# Altium PCB PCB.PcbDoc
Units mm, origin at the board's own origin, x right, y up, seen from the top; angles counter-clockwise.
Board outline 100 x 48.5 mm, 2 copper layers (TOP, BOT), stack 1.636 mm thick; 97 components, 84 nets, 366 pads, 228 vias.
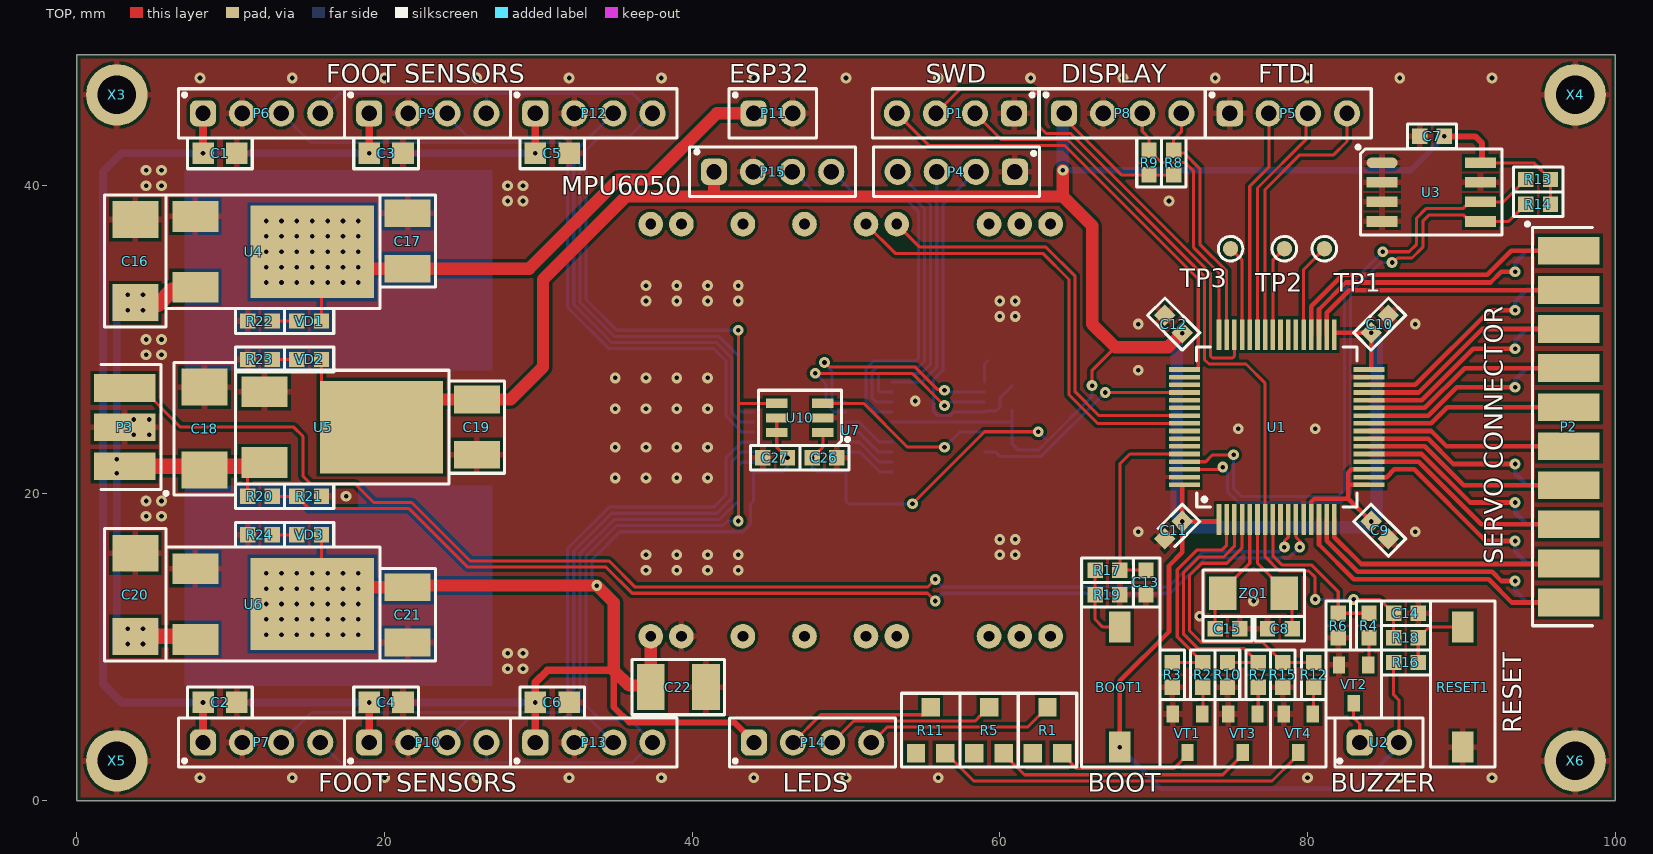
[diagram p0: TOP view]
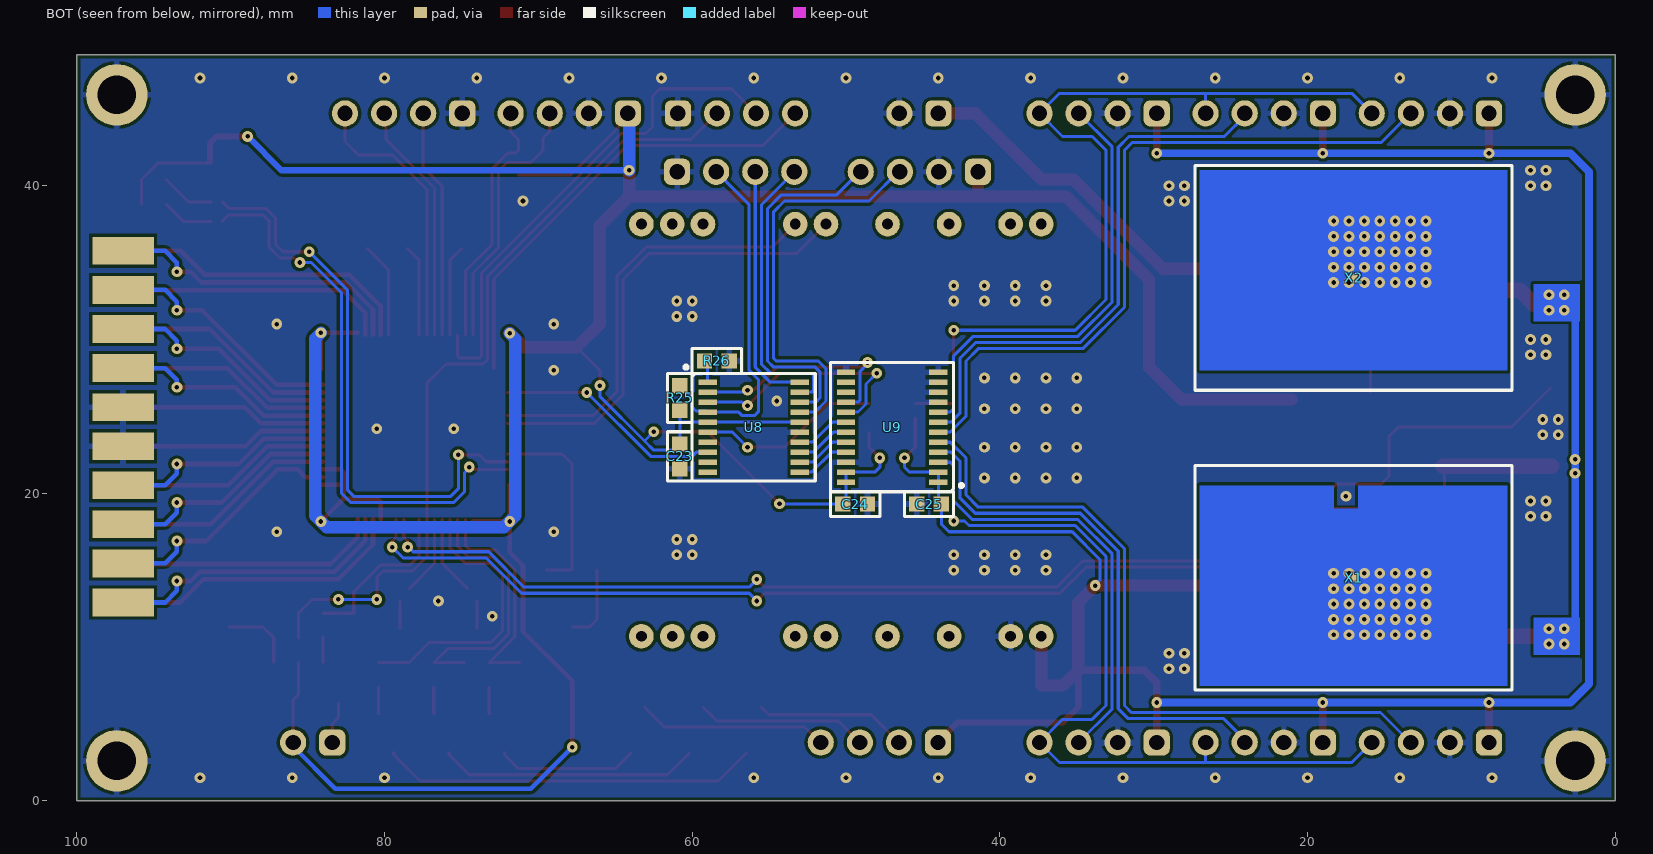
[diagram p1: BOT view, seen from below]

## Layer stack, top to bottom
Top Solder: solder mask 0.0102, Solder Resist, Dk 3.5
TOP: signal copper 0.018
Dielectric 1: core 1.6, FR-4, Dk 4.2
BOT: signal copper 0.018
Bottom Solder: solder mask 0.0102, Solder Resist, Dk 3.5

## Board outline
0,0 0,48.5 40,48.5 100,48.5 100,0 40,0

## Design rules (kind name [scope] priority, off if disabled: settings)
AcuteAngle [All] p1 off: minimum=3.50000000000000E+0001 checktracksonly=FALSE
AssemblyTestPointUsage [All] p1 off:
AssemblyTestpoint [All] p1 off: testpointundercomponent=TRUE minsize=1.016 maxsize=2.54 preferedsize=1.524 minholesize=0 maxholesize=1.016 preferedholesize=0.813 testpointgrid=0.025 usegrid=TRUE gridtolerance=0 allowsidetop=TRUE allowsidebottom=TRUE
BoardOutlineClearance "BoardOutlineClearance 1" [All] p1: gap=0.25 ignorepadtopadclearanceinfootprint=FALSE except(0: Arc-SplitContinuation Track-SplitContinuation SMDPad-SplitContinuation THPad-SplitContinuation Via-SplitContinuation Fill-SplitContinuation Poly-SplitContinuation Region-SplitContinuation Text-SplitContinuation) // Milling
BoardOutlineClearance "BoardOutlineClearance 2" [All] p2: gap=0.4 ignorepadtopadclearanceinfootprint=FALSE except(0: Arc-SplitContinuation Track-SplitContinuation SMDPad-SplitContinuation THPad-SplitContinuation Via-SplitContinuation Fill-SplitContinuation Poly-SplitContinuation Region-SplitContinuation Text-SplitContinuation) // V-Cut
Clearance "Clearance-1 1 Oz" [All] p1: gap=0.2 ignorepadtopadclearanceinfootprint=FALSE except(0.25: Arc-Hole Track-Hole SMDPad-Hole THPad-Hole Via-Hole Fill-Hole Poly-Hole Region-Hole Text-Hole) // Standart
Clearance "Clearance-1 1/2 Oz" [All] p2: gap=0.125 ignorepadtopadclearanceinfootprint=FALSE except(0.2: Arc-Fill Arc-Poly Track-Fill Track-Poly SMDPad-SMDPad SMDPad-Fill SMDPad-Poly THPad-Fill THPad-Poly Via-Fill Via-Poly Fill-Fill Fill-Poly Poly-Poly Poly-Region Poly-Text; 0.25: Arc-Hole Track-Hole SMDPad-Hole THPad-Hole Via-Hole Fill-Hole Poly-Hole Region-Hole Text-Hole) // Standart
Clearance "Clearance-2 1 Oz" [All] p3: gap=0.15 ignorepadtopadclearanceinfootprint=FALSE except(0.2: Arc-Fill Arc-Poly Track-Fill Track-Poly SMDPad-Fill SMDPad-Poly THPad-Fill THPad-Poly Via-Fill Via-Poly Fill-Fill Fill-Poly Poly-Poly; 0.25: Arc-Hole Track-Hole SMDPad-Hole THPad-Hole Via-Hole Fill-Hole Poly-Hole Region-Hole Text-Hole) // Advance
Clearance "Clearance-2 1/2 Oz" [All] p4: gap=0.1 ignorepadtopadclearanceinfootprint=FALSE except(0.15: Arc-Fill Arc-Poly Track-Fill Track-Poly SMDPad-SMDPad SMDPad-Fill SMDPad-Poly THPad-Fill THPad-Poly Via-Fill Via-Poly Fill-Fill Fill-Poly Poly-Poly Poly-Region Poly-Text; 0.25: Arc-Hole Track-Hole SMDPad-Hole THPad-Hole Via-Hole Fill-Hole Poly-Hole Region-Hole Text-Hole) // Advance
ComponentClearance [All] p1: gap=0 collisioncheckmode=3 verticalgap=0 showdistances=FALSE
DiffPairsRouting "DiffPairsRouting 1 Oz" [All] p1: maxlimit=0.254 minlimit=0.2 mostfreqgap=0.254 toplayer_minwidth=0.2 toplayer_maxwidth=0.381 toplayer_prefwidth=0.381 bottomlayer_minwidth=0.2 bottomlayer_maxwidth=0.381 bottomlayer_prefwidth=0.381 maxuncoupledlength=12.7
DiffPairsRouting "DiffPairsRouting 1/2 Oz" [All] p2: maxlimit=0.254 minlimit=0.1 mostfreqgap=0.254 toplayer_minwidth=0.1 toplayer_maxwidth=0.381 toplayer_prefwidth=0.381 bottomlayer_minwidth=0.1 bottomlayer_maxwidth=0.381 bottomlayer_prefwidth=0.381 maxuncoupledlength=12.7
FabricationTestPointUsage [All] p1 off: valid=0 allowmultiple=FALSE
FabricationTestpoint [All] p1 off: side=3 testpointundercomponent=TRUE minsize=1.016 maxsize=2.54 preferedsize=1.524 minholesize=0 maxholesize=1.016 preferedholesize=0.813 testpointgrid=0.025 allowsidetop=TRUE allowsidebottom=TRUE usegrid=TRUE gridtolerance=0
HoleSize "Minimum HoleSize" [IsPad] p1: absolutevalues=TRUE maxlimit=5.9 minlimit=0.6 maxpercent=80.000 minpercent=20.000
HoleSize "Minimum HoleSize VIA 1" [IsVia] p2: absolutevalues=TRUE maxlimit=5.9 minlimit=0.3 maxpercent=80.000 minpercent=20.000 // Standart
HoleSize "Minimum HoleSize VIA 2" [IsVia] p3: absolutevalues=TRUE maxlimit=5.9 minlimit=0.2 maxpercent=80.000 minpercent=20.000 // Advance
HoleToHoleClearance Hole2HoleClearance [All] p1: gap=0.25 allowstackedmicrovias=FALSE
MinimumAnnularRing "Minimum AR VIA Standart" [IsVia] p1: minimumring=0.15
MinimumAnnularRing "Minimum AR PAD Standart" [IsPAD] p2: minimumring=0.2
MinimumAnnularRing "Minimum AR VIA Advance" [IsVia] p3: minimumring=0.1
MinimumAnnularRing "Minimum AR PAD Advance" [IsPAD] p4: minimumring=0.15
MinimumSolderMaskSliver "SolderMask Bridge Standart" [All] p1: minsoldermaskwidth=0.15 // All Masks
MinimumSolderMaskSliver "SolderMask Bridge Advance" [All] p2: minsoldermaskwidth=0.1 // Mask LDI
PlaneClearance "PlaneClearance 1 Oz" [All] p1: clearance=0.2
PlaneClearance "PlaneClearance-1 1/2 Oz" [All] p2: clearance=0.2 // Standart
PlaneConnect "TermalConnect 2 Oz" [All] p1: planeconnectstyle=Relief reliefexpansion=0.2 reliefentries=4 reliefconductorwidth=0.3 reliefairgap=0.3 // Standart
PlaneConnect "TermalConnect-1 1 Oz" [All] p2: planeconnectstyle=Relief reliefexpansion=0.2 reliefentries=4 reliefconductorwidth=0.2 reliefairgap=0.2 // Standart
PlaneConnect "TermalConnect-1 1/2 Oz" [All] p3: planeconnectstyle=Relief reliefexpansion=0.2 reliefentries=4 reliefconductorwidth=0.2 reliefairgap=0.2 // Standart
PolygonConnect "PolygonConnect-1 1 Oz" [All] p1: thpad.connectstyle=Relief thpad.reliefconductorwidth=0.4 thpad.reliefentries=4 thpad.polygonreliefangle="90 Angle" thpad.airgapwidth=0.2 smdpad.connectstyle=Relief smdpad.reliefconductorwidth=0.4 smdpad.reliefentries=4 smdpad.polygonreliefangle="90 Angle" smdpad.airgapwidth=0.2 via.connectstyle=Direct via.reliefconductorwidth=0.254 via.reliefentries=4 via.polygonreliefangle="90 Angle" via.airgapwidth=0.254 // Standart
PolygonConnect "PolygonConnect-1 1/2 Oz" [All] p2: thpad.connectstyle=Relief thpad.reliefconductorwidth=0.15 thpad.reliefentries=4 thpad.polygonreliefangle="90 Angle" thpad.airgapwidth=0.2 smdpad.connectstyle=Relief smdpad.reliefconductorwidth=0.2 smdpad.reliefentries=4 smdpad.polygonreliefangle="90 Angle" smdpad.airgapwidth=0.2 via.connectstyle=Direct via.reliefconductorwidth=0.254 via.reliefentries=4 via.polygonreliefangle="90 Angle" via.airgapwidth=0.254 // Standart
RoutingCorners [All] p1 off: cornerstyle=45-Degree minsetback=2.54 maxsetback=2.54
RoutingVias [All] p1: holewidth=0.3 width=0.6 viastyle="Through Hole" minholewidth=0.2 minwidth=0.4 maxholewidth=5.9 maxwidth=6.4
SilkToBoardRegionClearance [All] p1 off:
SilkToSilkClearance Silk2SilkClearance [All] p1 off: silktosilkclearance=0.15
SilkToSolderMaskClearance Silk2SolderMaskClearance [IsPad] p1 off: minsilkscreentomaskgap=0.15 clearancetoexposedcopper=TRUE
SolderMaskExpansion SolderMaskExpansion-1 [All] p1: expansion=0.05 istentingtop=FALSE // Standart
SolderMaskExpansion "SolderMaskExpansion LDI" [All] p2: expansion=0.025 istentingtop=FALSE // Advance
Width "Width 1 Oz" [All] p1: maxlimit=10 minlimit=0.15 preferedwidth=0.2 checkconnectedcopper=TRUE
15 further rules are at their usual default settings.

## Components (designator, comment, footprint, x,y, rotation, side; value= is the part's Value field where it differs from the comment)
BOOT1 "Button" BUTTON_SMD_3x6 67.8,7.4 r90 top
C1 "1u 25V" C_0805/2012 9.3,42.1 r0 top
C2 "1u 25V" C_0805/2012 9.3,6.4 r0 top
C3 "1u 25V" C_0805/2012 20.1,42.1 r0 top
C4 "1u 25V" C_0805/2012 20.1,6.4 r0 top
C5 "1u 25V" C_0805/2012 30.9,42.1 r0 top
C6 "1u 25V" C_0805/2012 30.9,6.4 r0 top
C7 "1u 25V" C_0603/1608 88.1,43.2 r0 top
C8 "22p 50V" C_0603/1608 78.2,11.2 r180 top
C9 "1u 25V" C_0603/1608 84.7,17.6 r315 top
C10 "1u 25V" C_0603/1608 84.7,31 r45 top
C11 "1u 25V" C_0603/1608 71.3,17.6 r225 top
C12 "1u 25V" C_0603/1608 71.3,31 r135 top
C13 "10n 25V" C_0603/1608 69.5,14.2 r270 top
C14 "10n 25V" C_0603/1608 86.4,12.2 r0 top
C15 "22p 50V" C_0603/1608 74.8,11.2 r0 top
C16 "10u 16V" TECAP_TYPE_C 3.8,35.1 r90 top
C17 "100u 6.3V" TECAP_TYPE_B 21.5,36.4 r90 top
C18 "10u 16V" TECAP_TYPE_C 8.3,24.2 r90 top
C19 "100u 6.3V" TECAP_TYPE_B 26,24.3 r270 top
C20 "10u 16V" TECAP_TYPE_C 3.8,13.4 r90 top
C21 "47u 10V" TECAP_TYPE_B 21.5,12.1 r270 top
C22 "47u 10V" TECAP_TYPE_B 39.1,7.4 r0 top
C23 "1u 25V" C_0603/1608 60.8,22.4 r270 bottom
C24 "1u 25V" C_0603/1608 49.4,19.3 r180 bottom
C25 "1u 25V" C_0603/1608 44.6,19.3 r0 bottom
C26 "1u 25V" C_0603/1608 48.6,22.3 r0 top
C27 "1u 25V" C_0603/1608 45.4,22.3 r180 top
P1 "Debug" "PLS-4 2.54"#1 60.927,44.7 r180 top
P2 "Servo signals" "PLD-20 2.54 OUTLINE" 97,35.76 r270 top locked
P3 "Power" "PLS-3 2.54 OUTLINE" 3.1,21.76 r90 top locked
P4 "SMCU Debug" "PLS-4 2.54"#1 60.98,40.9 r180 top
P5 "FTDI" "PLS-4 2.54"#2 74.947,44.7 r0 top
P6 "Foot sensor 1" "PLS-4 2.54"#1 8.2,44.7 r0 top
P7 "Foot sensor 4" "PLS-4 2.54"#1 8.2,3.8 r0 top
P8 "Display" "PLS-4 2.54"#1 64.18,44.7 r0 top
P9 "Foot sensor 2" "PLS-4 2.54"#1 19,44.7 r0 top
P10 "Foot sensor 5" "PLS-4 2.54"#1 19,3.8 r0 top
P11 "ESP32 CAM" "PLS-2 2.54" 43.993,44.7 r0 top
P12 "Foot sensor 3" "PLS-4 2.54"#1 29.8,44.7 r0 top
P13 "Foot sensor 6" "PLS-4 2.54"#1 29.8,3.8 r0 top
P14 "Front LEDs" "PLS-4 2.54"#1 44.02,3.8 r0 top
P15 "Display" "PLS-4 2.54"#1 41.42,40.9 r0 top
R1 "1k" R_VAR_3.2x3.2_SMD#1 63.1,4.6 r0 top
R2 "1k" R_0603/1608 73.2,8.2 r90 top
R3 "100k" R_0603/1608 71.2,8.2 r90 top
R4 "1k" R_0603/1608 84,11.4 r90 top
R5 "1k" R_VAR_3.2x3.2_SMD#1 59.3,4.6 r0 top
R6 "100k" R_0603/1608 82,11.4 r90 top
R7 "1k" R_0603/1608 76.8,8.2 r90 top
R8 "10k" R_0603/1608 71.3,41.5 r90 top
R9 "10k" R_0603/1608 69.7,41.5 r90 top
R10 "100k" R_0603/1608 74.8,8.2 r90 top
R11 "1k" R_VAR_3.2x3.2_SMD#2 55.5,4.6 r0 top
R12 "1k" R_0603/1608 80.4,8.2 r90 top
R13 "10k" R_0603/1608 95,40.4 r180 top
R14 "10k" R_0603/1608 95,38.8 r180 top
R15 "100k" R_0603/1608 78.4,8.2 r90 top
R16 "100k" R_0603/1608 86.4,9 r0 top
R17 "1k" R_0603/1608 67,15 r0 top
R18 "1k" R_0603/1608 86.4,10.6 r180 top
R19 "100k" R_0603/1608 67,13.4 r0 top
R20 "10k" R_0603/1608 11.9,19.8 r180 top
R21 "3k3" R_0603/1608 15.1,19.8 r180 top
R22 "10k" R_0603/1608 11.9,31.2 r0 top
R23 "10k" R_0603/1608 11.9,28.7 r0 top
R24 "10k" R_0603/1608 11.9,17.3 r0 top
R25 "100k" R_0603/1608 60.8,26.2 r90 bottom
R26 "100k" R_0603/1608 58.4,28.6 r180 bottom
RESET1 "Button" BUTTON_SMD_3x6 90.1,7.4 r270 top
TP1 "Debug" TP_SMD_D1.00 81.1,35.9 r0 top
TP2 "MCO" TP_SMD_D1.00 78.5,35.9 r0 top
TP3 "Debug" TP_SMD_D1.00 75,35.9 r90 top
U1 "STM32F373RCT6" LQFP64 78,24.3 r90 top locked
U2 "Buzzer" "PLS-2 2.54" 83.4,3.8 r0 top
U3 "M24C64-WMN6P" SO8_1.27 88.05,39.58 r0 top locked
U4 "MC33269DT-3.3G" TO252AA/DPAK 13.3,35.7 r270 top
U5 "MC33269DT-3.3G" TO252AA/DPAK 17.8,24.3 r270 top
U6 "MC33269DT-5.0G" TO252AA/DPAK 13.3,12.8 r270 top
U7 "HLK-RM04" HLK-RM04 50.3,23.7 r90 top locked
U8 "STM32F030F" SO20_0.65 56,24.3 r180 bottom
U9 "74LVC4245APW" SO24_0.65 47,24.3 r0 bottom
U10 "SN74LVC1T45" SOT23-6 47,24.9 r180 top
VD1 "TO-3216BC-PG (G)" LED_0603/1608 15.1,31.2 r180 top
VD2 "TO-3216BC-PG (G)" LED_0603/1608 15.1,28.7 r180 top
VD3 "TO-3216BC-PG (G)" LED_0603/1608 15.1,17.3 r180 top
VT1 "IRLML6244" SOT23-3 72.2,4.4 r270 top
VT2 "IRLML6244" SOT23-3 83,7.6 r270 top
VT3 "IRLML6244" SOT23-3 75.8,4.4 r270 top
VT4 "IRLML6244" SOT23-3 79.4,4.4 r270 top
X1 "HEATSINK" "HEATSINK 20x14x6" 17,14.5 r270 bottom
X2 "HEATSINK" "HEATSINK 20x14x6" 17,34 r270 bottom
X3 "Mounting hole" HOLE_M2_D4.0/2.5 2.6,45.9 r0 top
X4 "Mounting hole" HOLE_M2_D4.0/2.5 97.4,45.9 r0 top
X5 "Mounting hole" HOLE_M2_D4.0/2.5 2.6,2.6 r0 top
X6 "Mounting hole" HOLE_M2_D4.0/2.5 97.4,2.6 r0 top
ZQ1 "NX5032GA-8MHz" "OSC_2PINS SMD" 76.5,13.5 r0 top

## Footprints (in the part's own frame and the unit in brackets; to place one, negate y for a bottom-side part, rotate by r counter-clockwise, add the part's x,y. Pads: shape width x height; smd on the part's side, far side on the other; paste and mask are expansions set on the pad)
BUTTON_SMD_3x6 [mm]
  rect 2x1.4 smd mask+0.1: 1(-3.9,0) 2(3.9,0)
  silkscreen extent -5.2,-2.6 5.2,2.5, body extent -3.89,-1.79 3.89,1.79, height 2.54
C_0603/1608 [mm] "Capacitor, SMD, 0603 (1608 metric)"
  rect 1x1 smd mask+0.1: 1(-0.8,0) 2(0.8,0)
  silkscreen extent -1.6,-0.8 1.6,0.8, body extent -0.8,-0.4 0.8,0.4, height 0.7
C_0805/2012 [mm] "Capacitor, SMD, 0805 (2012 metric)"
  rect 1.4x1.4 smd mask+0.1: 1(-1.1,0) 2(1.1,0)
  silkscreen extent -2.1,-1 2.1,1, body extent -1,-0.62 1,0.63, height 1.25
"HEATSINK 20x14x6" [mm]
  rect 0.5x0.5 smd mask+0.102: 1(0,0)
  silkscreen extent -7.3,-10.3 7.3,10.3, body extent -7,-10 7,10, height 4
HLK-RM04 [mm]
  round 1.6 hole 0.7 mask+0.1: 1(-13,13) 2(-13,11) 4(-13,7) 6(-13,3) 8(-13,-1) 9(-13,-3) 12(-13,-9) 13(-13,-11) 14(-13,-13) 15(13.8,-13) 16(13.8,-11) 17(13.8,-9) 20(13.8,-3) 21(13.8,-1) 23(13.8,3) 25(13.8,7) 27(13.8,11) 28(13.8,13)
  body extent -14.2,-14.5 15,25.6, height 10.32
HOLE_M2_D4.0/2.5 [mm]
  round 4 hole 2.5 mask+0.1: 1(0,0)
LED_0603/1608 [mm] "LED, SMD, 0603 (1608 metric)"
  rect 1x1 smd mask+0.1: A(-0.8,0) C(0.8,0)
  silkscreen extent -1.6,-0.8 1.6,0.8, body extent -0.8,-0.4 0.8,0.4, height 0.6
LQFP64 [mm]
  rect 2x0.3 smd mask+0.12: 1(-6,3.75) 2(-6,3.25) 3(-6,2.75) 4(-6,2.25) 5(-6,1.75) 6(-6,1.25) 7(-6,0.75) 8(-6,0.25) 9(-6,-0.25) 10(-6,-0.75) 11(-6,-1.25) 12(-6,-1.75) 13(-6,-2.25) 14(-6,-2.75) 15(-6,-3.25) 16(-6,-3.75) 33(6,-3.75) 34(6,-3.25) 35(6,-2.75) 36(6,-2.25) 37(6,-1.75) 38(6,-1.25) 39(6,-0.75) 40(6,-0.25) 41(6,0.25) 42(6,0.75) 43(6,1.25) 44(6,1.75) 45(6,2.25) 46(6,2.75) 47(6,3.25) 48(6,3.75)
  rect 0.3x2 smd mask+0.12: 17(-3.75,-6) 18(-3.25,-6) 19(-2.75,-6) 20(-2.25,-6) 21(-1.75,-6) 22(-1.25,-6) 23(-0.75,-6) 24(-0.25,-6) 25(0.25,-6) 26(0.75,-6) 27(1.25,-6) 28(1.75,-6) 29(2.25,-6) 30(2.75,-6) 31(3.25,-6) 32(3.75,-6) 49(3.75,6) 50(3.25,6) 51(2.75,6) 52(2.25,6) 53(1.75,6) 54(1.25,6) 55(0.75,6) 56(0.25,6) 57(-0.25,6) 58(-0.75,6) 59(-1.25,6) 60(-1.75,6) 61(-2.25,6) 62(-2.75,6) 63(-3.25,6) 64(-3.75,6)
  silkscreen extent -5.2,-5.23 5.22,5.2, body extent -6,-6 6,6, height 1.6
"OSC_2PINS SMD" [mm] "Crystal oscillator, SMD, 2 pins"
  rect 1.8x2.2 smd mask+0.1: 1(-2,0) 2(2,0)
  silkscreen extent -3.3,-1.5 3.3,1.5, body extent -1.6,-1.26 1.6,1.26, height 1
"PLD-20 2.54 OUTLINE" [mm] "Pitch 2.54"
  rect 1.8x4 smd mask+0.1: 1(0,0) 3(2.54,0) 5(5.08,0) 7(7.62,0) 9(10.16,0) 11(12.7,0) 13(15.24,0) 15(17.78,0) 17(20.32,0) 19(22.86,0)
  rect 1.8x4 smd far side mask+0.1: 2(0,0) 4(2.54,0) 6(5.08,0) 8(7.62,0) 10(10.16,0) 12(12.7,0) 14(15.24,0) 16(17.78,0) 18(20.32,0) 20(22.86,0)
  silkscreen extent -1.52,-2.36 24.37,1.54, body extent -1.33,-0.46 24.07,11.08, height 1.67
"PLS-2 2.54" [mm] "Pitch 2.54"
  rrect50% 1.7x1.7 hole 1 mask+0.1: 1(0,0)
  round 1.7 hole 1 mask+0.1: 2(2.54,0)
  silkscreen extent -1.6,-1.6 4.1,1.6
"PLS-3 2.54 OUTLINE" [mm] "Pitch 2.54"
  rect 1.8x4 smd mask+0.1: 1(0,0) 2(2.54,0) 3(5.08,0)
  silkscreen extent -1.52,-2.36 6.6,1.54
"PLS-4 2.54"#1 [mm] "Pitch 2.54"
  rrect50% 1.7x1.7 hole 1 mask+0.1: 1(0,0)
  round 1.7 hole 1 mask+0.1: 2(2.54,0) 3(5.08,0) 4(7.62,0)
  silkscreen extent -1.6,-1.6 9.2,1.6, body extent -1.27,-1.27 8.89,1.27, height 8.54
"PLS-4 2.54"#2 [mm] "Pitch 2.54"
  rrect50% 1.7x1.7 hole 1: 1(0,0)
  round 1.7 hole 1: 2(2.54,0) 3(5.08,0) 4(7.62,0)
  silkscreen extent -1.6,-1.6 9.2,1.6
R_0603/1608 [mm] "Resistor, SMD, 0603 (1608 metric)"
  rect 1x1 smd mask+0.1: 1(-0.8,0) 2(0.8,0)
  silkscreen extent -1.6,-0.8 1.6,0.8, body extent -0.8,-0.4 0.8,0.4, height 0.45
R_VAR_3.2x3.2_SMD#1 [mm] "Resistor variable"
  rect 1.2x1.2 smd mask+0.1: 1(-0.95,-1.5) 2(0,1.5) 3(0.95,-1.5)
  silkscreen extent -1.9,-2.4 1.9,2.4, body extent -1.55,-1.9 1.55,1.9, height 1.62
R_VAR_3.2x3.2_SMD#2 [mm] "Resistor variable"
  rect 1.2x1.2 smd: 1(-0.95,-1.5) 2(0,1.5) 3(0.95,-1.5)
  silkscreen extent -1.9,-2.4 1.9,2.4, body extent -1.55,-1.9 1.55,1.9, height 1.62
SO8_1.27 [mm]
  oval 2x0.7 smd mask+0.1: 1(-3.2,1.905)
  rect 2x0.7 smd mask+0.1: 2(-3.2,0.635) 3(-3.2,-0.635) 4(-3.2,-1.905) 5(3.2,-1.905) 6(3.2,-0.635) 7(3.2,0.635) 8(3.2,1.905)
  silkscreen extent -4.6,-2.8 4.6,2.8, body extent -3.1,-2.5 3.1,2.5, height 1.75
SO20_0.65 [mm]
  rect 1.2x0.35 smd mask+0.1: 1(-3,2.925) 2(-3,2.275) 3(-3,1.625) 4(-3,0.975) 5(-3,0.325) 6(-3,-0.325) 7(-3,-0.975) 14(3,-0.975) 15(3,-0.325) 16(3,0.325) 17(3,0.975) 18(3,1.625) 19(3,2.275) 20(3,2.925)
  rect 1.2x0.35 smd: 8(-3,-1.625) 9(-3,-2.275) 10(-3,-2.925) 11(3,-2.925) 12(3,-2.275) 13(3,-1.625)
  silkscreen extent -4,-3.5 4,3.5, body extent -3.15,-3.2 3.15,3.2, height 1
SO24_0.65 [mm]
  rect 1.2x0.35 smd mask+0.1: 1(-3,3.575) 2(-3,2.925) 3(-3,2.275) 4(-3,1.625) 5(-3,0.975) 6(-3,0.325) 7(-3,-0.325) 8(-3,-0.975) 9(-3,-1.625) 10(-3,-2.275) 11(-3,-2.925) 12(-3,-3.575) 13(3,-3.575) 14(3,-2.925) 15(3,-2.275) 16(3,-1.625) 17(3,-0.975) 18(3,-0.325) 19(3,0.325) 20(3,0.975) 21(3,1.625) 22(3,2.275) 23(3,2.925) 24(3,3.575)
  silkscreen extent -4,-4.2 4,4.2, body extent -3.15,-3.9 3.15,3.9, height 1
SOT23-3 [mm] "SOT23, 3 pins"
  rect 1.1x0.8 smd mask+0.1: 1(-1.25,0.95) 2(-1.25,-0.95) 3(1.25,0)
  silkscreen extent -2.2,-1.8 2.2,1.8, body extent -1.13,-1.5 1.13,1.5, height 1.22
SOT23-6 [mm]
  rect 1.4x0.6 smd mask+0.1: 1(-1.5,0.95) 2(-1.5,0) 3(-1.5,-0.95) 4(1.5,-0.95) 5(1.5,0) 6(1.5,0.95)
  silkscreen extent -2.7,-1.8 2.7,1.8, body extent -1.42,-1.46 1.42,1.46, height 1.12
TECAP_TYPE_B [mm] "Tantalum capacitor, Type B, SMD"
  rect 1.8x3 smd: 1(-1.8,0) 2(1.8,0)
  silkscreen extent -3,-1.8 3,1.8, body extent -1.85,-1.5 1.85,1.5, height 2.1
TECAP_TYPE_C [mm] "Tantalum capacitor, Type C, SMD"
  rect 2.4x3 smd: 1(-2.7,0) 2(2.7,0)
  silkscreen extent -4.3,-2 4.3,2, body extent -3.1,-1.7 3.1,1.7, height 2.8
TO252AA/DPAK [mm] "TO252AA/DPAK package"
  rect 2x3 smd mask+0.1: 1(-2.3,-5.6) 2(2.3,-5.6)
  rect 6x8 smd mask+0.1: 3(0,2)
  silkscreen extent -3.7,-7.5 3.7,6.4, body extent -3.37,-6.01 3.37,4.38, height 2.39
TP_SMD_D1.00 [mm] "SMD test point, 1.0 mm diameter"
  round 1 smd paste-10 mask+0.1: 1(0,0)
  silkscreen extent -0.8,-0.8 0.8,0.8

## Part data
C1 C2 C3 C4 C5 C6 C7 C8 C9 C10 C11 C12 C13 C14 C15 C23 C24 C25 C26 C27: library part Capacitor, "Non-polarized capacitor"
C16 C17 C18 C19 C20 C21 C22: library part "Capacitor polar", "Polarized capacitor"
P1 P4 P5 P6 P7 P8 P9 P10 P12 P13 P14 P15: library part "Header 4", "Header, 4-Pin", LatestRevisionDate=17-Jul-2002, LatestRevisionNote="Re-released for DXP Platform.", Publisher="Altium Limited"
P2: library part "Header 2x10", "Header, 20-Pin", LatestRevisionDate=17-Jul-2002, LatestRevisionNote="Re-released for DXP Platform.", Publisher="Altium Limited"
P3: library part "Header 3", "Header, 3-Pin", LatestRevisionDate=17-Jul-2002, LatestRevisionNote="Re-released for DXP Platform.", Publisher="Altium Limited"
P11: library part "Header 2", "Header, 2-Pin", LatestRevisionDate=17-Jul-2002, LatestRevisionNote="Re-released for DXP Platform.", Publisher="Altium Limited"
R1 R5 R11: library part "Resistor variable", "Resistor variable"
R2 R3 R4 R6 R7 R8 R9 R10 R12 R13 R14 R15 R16 R17 R18 R19 R20 R21 R22 R23 R24 R25 R26: library part Resistor, "Resistor"
TP1 TP2 TP3: library part "Test point", "Test point"
U1: library part STM32F373R, "32-bit Cortex-M3"
U3: library part "I2C EEPROM", "I2C EEPROM"
U4 U5 U6: library part LM1117, "LDO voltage regulator"
U7: "WIFI-UART bridge"
U8: "32-bit Cortex-M0"
U9 U10: "Logic level converter"
VD1 VD2 VD3: library part LED, "LED"
VT1 VT2 VT3 VT4: library part "MOSFET N", "MOSFET N"
X3 X4 X5 X6: "Hole for screw M3, outline D6"
ZQ1: library part "Crystal oscillator", "Crystal oscillator"

## Via types
v1: diameter 0.7, hole 0.3, TOP to BOT, tented both sides, 228 vias

## Nets (pads, with @x,y where several pads share a name; then routed paths per layer and width w, separated by ;. In a path a pad name is that pad's centre, name@x,y a point inside that pad or via, vN(x,y) a via of type N, cw(c..) or ccw(c..) an arc to the next point about the centre after c; other vN are vias at no path point)
BUZZER: R4.2 R6.2 U1.8 | length 11
  TOP w0.2: U1.8 77.75,15.931 78.331,15.35 80.25,15.35 82,13.6 R6.2 R4.2
DGND: C1.2 C2.2 C3.2 C4.2 C5.2 C6.2 C7.1 C8.2 C9.2 C10.2 C11.2 C12.2 C13.2 C14.2 C15.2 C16.2 C17.2 C18.2 C19.2 C20.2 C21.2 C22.2 C23.2 C24.2 C25.2 C26.2 C27.2 P1.1 P2.10 P2.12 P3.2 P4.1 P5.1 P6.2 P7.2 P8.2 P9.2 P10.2 P11.2 P12.2 P13.2 P15.2 R3.1 R6.1 R10.1 R15.1 R19.2 R21.1 R22.1 R23.1 R24.1 R26.2 RESET1.2 U1.12 U1.31 U1.63 U3.1 U3.2 U3.3 U3.4 U3.7 U4.1 U5.1 U6.1 U7.2 U8.15 U9.9 U9.10 U9.11 U9.12 U9.13 U9.22 U10.2 VT1.2 VT2.2 VT3.2 VT4.2 X3.1 X4.1 X5.1 X6.1
  other v1: 8,1.5 14,1.5 20,1.5 26,1.5 32,1.5 38,1.5 44,1.5 50,1.5 56,1.5 80,1.5 86,1.5 92,1.5 28,8.6 29,8.6 28,9.6 29,9.6 73,12 76.5,13 37,15 39,15 41,15 43,15 37,16 39,16 41,16 43,16 60,16 61,16 60,17 61,17 69,17.5 87,17.5 4.5,18.5 5.5,18.5 4.5,19.5 5.5,19.5 17.5,19.8 35,21 37,21 39,21 41,21 35,23 37,23 39,23 41,23 3.7,23.8 4.7,23.8 75.5,24.2 80.5,24.2 3.7,24.8 4.7,24.8 35,25.5 37,25.5 39,25.5 41,25.5 54.5,26 35,27.5 37,27.5 39,27.5 41,27.5 69,28 4.5,29 5.5,29 4.5,30 5.5,30 69,31 87,31 60,31.5 61,31.5 37,32.5 39,32.5 41,32.5 43,32.5 60,32.5 61,32.5 37,33.5 39,33.5 41,33.5 43,33.5 28,39 29,39 71,39 4.5,40 5.5,40 28,40 29,40 4.5,41 5.5,41 8,47 14,47 20,47 26,47 32,47 38,47 44,47 50,47 56,47 62,47 68,47 74,47 80,47 86,47 92,47
DI_1: U8.14 U9.18 | length 3.5
  BOT w0.2: U9.18 50.875,24.625 52.175,23.325 U8.14
DI_2: U8.3 U9.17 | length 15.8
  TOP w0.2: v1(48,27.8) 54.3,27.8 v1(56.4,25.7)
  BOT w0.2: v1(48,27.8) 48.7,27.1 48.7,25.8 49.217,25.283 49.992,25.283 U9.17 ; v1(56.4,25.7) 56.535,25.7 56.76,25.925 U8.3
DI_3: U8.2 U9.16 | length 14.8
  TOP w0.2: v1(48.6,28.5) 48.667,28.5 48.967,28.2 54.5,28.2 55.94,26.76 56.34,26.76 v1(56.4,26.7)
  BOT w0.2: v1(48.6,28.5) 48.6,28.4 49.1,27.9 49.1,26.042 49.217,25.925 U9.16 ; v1(56.4,26.7) 56.535,26.7 56.66,26.575 U8.2
DI_4: U8.13 U9.19 | length 3.5
  BOT w0.2: U9.19 50.825,23.975 52.125,22.675 U8.13
DI_5: U8.12 U9.20 | length 3.5
  BOT w0.2: U9.20 50.875,23.325 52.175,22.025 U8.12
DI_6: U8.11 U9.21 | length 3.5
  BOT w0.2: U9.21 50.925,22.675 52.217,21.383 52.992,21.383 U8.11
DVDD_3V3: BOOT1.1 C7.2 C9.1 C10.1 C11.1 C12.1 C19.1 C23.1 C24.1 C26.1 P8.1 P15.1 R8.1 R9.1 R13.1 R14.1 R16.1 R25.1 U1.1 U1.13 U1.17 U1.19 U1.32 U1.33 U1.64 U2.2 U3.8 U5.3 U8.5 U8.16 U9.23 U9.24 U10.1 VD2.A | length 264.8
  TOP w0.2: U5.3@15.9,26.6 VD2.A ; v1(47.8,22.3) 48.2,22.7 48.5,23 U10.1 ; v1(54.325,19.325) 59,24 v1(62.5,24) ; P8.1 64.729,44.151 64.729,43.871 67.9,40.7 R9.1 R8.1 ; v1(66,27) 66,28 67.5,29.5 ; R16.1 85.6,6.9 85.94,6.56 U2.2 ; U3.8@91.35,41.585 U3.8 94.715,41.485 R13.1 R14.1
  TOP w0.3: v1(67.8,3.5) 67.8,7.8 71,11 71,15.3 71.866,16.166 v1(71.866,18.166) ; U1.64@71.866,20.55 v1(71.866,18.166) ; U1.1@74.25,18.166 v1(71.866,18.166) ; U1.13 80.25,19.445 80.455,19.65 82.65,19.65 ; U1.33@81.75,30.434 v1(84.134,30.434) U1.32@84.134,28.05 ; U1.17 82.65,20.55 ; U1.19 82.95,21.55 82.855,21.55 82.65,21.345 82.65,20.55 ; v1(84.134,18.166) 82.65,19.65 ; 82.65,19.65 82.65,20.55
  TOP w0.4: v1(88.9,43.2) 90.9,43.2 91.35,42.75 U3.8@91.35,41.585
  TOP w0.8: U5.3@21,26.1 C19.1 28.2,26.1 30.3,28.2 30.3,33.9 35.7,39.3 41.5,39.3 64.1,39.3 ; 41.42,39.38 P15.1@41.42,41 ; P15.1 P15.1@41.5,40.82 ; v1(64.1,41) 64.1,39.3 ; C12.1 70.931,29.5 67.5,29.5 66,31 66,37.4 64.1,39.3
  BOT w0.2: v1(47.8,22.3) 47.8,21.7 48.125,21.375 U9.23 U9.24 50,19.5 C24.1 54.3,19.3 v1(54.325,19.325) ; U8.16 U8.5 60.8,24.625 ; R25.1 60.8,24.625 ; v1(62.5,24) 63.1,23.4 ; v1(66,27) 66,26.3 63.1,23.4 ; U2.2@85.94,3.54 U2.2 ; 60.8,24.625 C23.1 61.2,22.8 62.5,22.8 63.1,23.4
  BOT w0.3: v1(67.8,3.5) 70.5,0.8 83.2,0.8 U2.2@85.94,3.54
  BOT w0.4: v1(64.1,41) 86.7,41 v1(88.9,43.2)
  BOT w0.8: v1(64.1,41) P8.1@64.1,44.62 ; v1(71.866,30.4) 71.5,30.034 71.5,18.531 v1(71.866,18.166) 72.231,17.8 83.769,17.8 84.5,18.531 84.5,30.069 v1(84.134,30.434)
DVDD_5V0: C1.1 C2.1 C3.1 C4.1 C5.1 C6.1 C21.1 C22.1 C25.1 C27.1 P6.1 P7.1 P9.1 P10.1 P12.1 P13.1 P14.1 U6.3 U7.1 U9.1 U9.2 U10.5 U10.6 VD3.A X1.1 | length 177.8
  TOP w0.2: U6.3@15.9,15.2 VD3.A ; U10.5 U10.6 45.5,23 v1(46.2,22.3)
  TOP w0.4: 34.9,8.5 34.9,6.1 35.9,5.1 42.72,5.1 P14.1
  TOP w0.5: P7.1 v1(8.2,6.4) ; v1(8.2,42.1) P6.1 ; P10.1 v1(19,6.4) ; v1(19,42.1) P9.1 ; P13.1 v1(29.8,6.4) 29.8,7.7 30.6,8.5 34.9,8.5 ; v1(29.8,42.1) P12.1
  TOP w0.8: U6.3@18.3,13.9 C21.1 21.6,14 v1(33.8,14) 34.9,12.9 34.9,8.5 35.9,7.5 37.3,7.5 U7.1
  BOT w0.2: P7.1@7.791,4.209 P7.1 ; v1(33.8,14) 33.8,14.067 33.5,14.367 33.5,15.7 35.3,17.5 43.3,17.5 43.8,18 C25.1 44,19.5 U9.1 U9.2 45.875,21.375 46.2,21.7 v1(46.2,22.3)
  BOT w0.5: v1(29.8,6.4) v1(19,6.4) v1(8.2,6.4) 2.9,6.4 1.7,7.6 1.7,40.9 2.9,42.1 v1(8.2,42.1) v1(19,42.1) v1(29.8,42.1)
  other v1: 12.3,10.8 13.3,10.8 14.3,10.8 15.3,10.8 16.3,10.8 17.3,10.8 18.3,10.8 12.3,11.8 13.3,11.8 14.3,11.8 15.3,11.8 16.3,11.8 17.3,11.8 18.3,11.8 12.3,12.8 13.3,12.8 14.3,12.8 15.3,12.8 16.3,12.8 17.3,12.8 18.3,12.8 12.3,13.8 13.3,13.8 14.3,13.8 15.3,13.8 16.3,13.8 17.3,13.8 18.3,13.8 12.3,14.8 13.3,14.8 14.3,14.8 15.3,14.8 16.3,14.8 17.3,14.8 18.3,14.8
FRONT_LED_B: P14.2 R11.2 | length 9.9
  TOP w0.2: P14.2 48.36,5.6 55,5.6 R11.2
FRONT_LED_B_CTRL: R12.2 R15.2 U1.4 | length 18.5
  TOP w0.2: U1.4 75.75,16.45 74.753,15.453 73.119,15.453 72.333,14.667 72.333,11.067 73.1,10.3 77.1,10.3 R15.2 R12.2
FRONT_LED_G: P14.3 R5.2 | length 11.2
  TOP w0.2: P14.3 50.5,5.2 58.4,5.2 58.8,5.6 R5.2
FRONT_LED_G_CTRL: R7.2 R10.2 U1.3 | length 17.4
  TOP w0.2: R10.2 R7.2 75.9,9.9 72.9,9.9 71.933,10.867 71.933,14.833 72.97,15.87 74.57,15.87 75.25,16.55 U1.3
FRONT_LED_R: P14.4 R1.2 | length 12.4
  TOP w0.2: P14.4 51.666,3.8 52.666,4.8 61.8,4.8 R1.2
FRONT_LED_R_CTRL: R2.2 R3.2 U1.2 | length 14.3
  TOP w0.2: R3.2 R2.2 71.533,10.667 71.533,15.033 72.8,16.3 74.434,16.3 74.75,16.616 U1.2
"FTDI_DTR (CLI)": P5.2 U1.44 | length 14.9
  TOP w0.2: U1.44 76.25,39.95 77.487,41.187 P5.2
"FTDI_RX (CLI)": P5.4 U1.42 | length 17.9
  TOP w0.2: U1.42 77.25,39.75 79.5,42 81.7,42 82.567,42.867 P5.4
"FTDI_TX (CLI)": P5.3 U1.43 | length 15.8
  TOP w0.2: U1.43 76.75,39.85 79.917,43.017 79.917,44.589 P5.3
"HLK_RM04_RX (SWLP)": U1.55 U7.20 | length 28.3
  TOP w0.2: U7.20 54.8,36 63,36 64.9,34.1 64.9,26.6 66.45,25.05 U1.55
"HLK_RM04_TX (SWLP)": U1.56 U7.21 | length 30.5
  TOP w0.2: U7.21 53.2,35.6 62.8,35.6 64.5,33.9 64.5,26.4 66.35,24.55 U1.56
HX711_DI_1: P6.3 U9.6 | length 47.4
  BOT w0.2: P6.3 13.3,44.7 15.2,42.8 31.4,42.8 31.9,42.3 31.9,32.103 34.603,29.4 35.5,29.4 41.4,29.4 42.2,28.6 42.2,25 43.217,23.983 43.992,23.983 U9.6
HX711_DI_2: P9.3 U9.7 | length 36.4
  BOT w0.2: P9.3 24.08,44.52 25.4,43.2 31.6,43.2 32.3,42.5 32.3,32.269 34.769,29.8 41.566,29.8 42.6,28.766 42.6,25.2 43.175,24.625 U9.7
HX711_DI_3: P12.3 U9.8 | length 29.4
  BOT w0.2: P12.3 32.7,42.52 32.7,32.434 34.934,30.2 41.731,30.2 43,28.931 43,25.5 43.217,25.283 43.992,25.283 U9.8
HX711_DI_4: P7.3 U9.5 | length 46.2
  BOT w0.2: P7.3 13.3,3.8 15.25,5.75 31.45,5.75 31.9,6.2 31.9,16.4 34.6,19.1 41.4,19.1 42.2,19.9 42.2,22.3 43.217,23.317 43.992,23.317 U9.5
HX711_DI_5: P10.3 U9.4 | length 35.2
  BOT w0.2: P10.3 24.08,3.98 25.45,5.35 31.65,5.35 32.3,6 32.3,16.234 34.766,18.7 41.6,18.7 42.6,19.7 42.6,22.1 43.175,22.675 U9.4
HX711_DI_6: P13.3 U9.3 | length 28.3
  BOT w0.2: P13.3 32.7,5.98 32.7,16.066 34.934,18.3 41.8,18.3 43,19.5 43,21.8 43.217,22.017 43.992,22.017 U9.3
HX711_SCK: U8.6 U10.3 | length 12.1
  TOP w0.2: U10.3 51.15,25.85 54,23 v1(56.4,23)
  BOT w0.2: v1(56.4,23) 57.375,23.975 U8.6
HX711_SCK_1: P6.4 P7.4 P9.4 P10.4 P12.4 P13.4 U10.4 | length 114.5
  TOP w0.2: v1(43,18.2) 43,25.85 ; v1(43,30.6) 43,25.85 ; U10.4 43,25.85
  BOT w0.2: P7.4 17.12,2.5 26.62,2.5 ; P6.4 17.12,46 26.62,46 ; P10.4 26.62,2.5 ; P9.4 26.62,46 ; v1(43,18.2) 42.3,18.2 42,17.9 35.1,17.9 33.1,15.9 33.1,6.2 34,5.3 35.92,5.3 P13.4 36.12,2.5 26.62,2.5 ; v1(43,30.6) 35.1,30.6 33.1,32.6 33.1,42.3 34,43.2 35.92,43.2 P12.4 36.12,46 26.62,46
I2C1_SCL: R13.2 U1.61 U3.6 | length 41.2
  TOP w0.2: U1.61 73.381,22.05 73.831,22.5 v1(75.2,22.5) ; v1(84.9,35.7) 86.6,35.7 87.1,36.2 87.1,37.9 87.7,38.5 90.1,38.5 U3.6@90.545,38.945 ; U3.6 92.745,38.945 R13.2
  BOT w0.2: v1(75.2,22.5) 75.2,20.3 75.7,19.8 82,19.8 82.4,20.2 82.4,33.2 v1(84.9,35.7)
I2C1_SDA: R14.2 U1.62 U3.5 | length 40.3
  TOP w0.2: U1.62 74.215,21.55 74.365,21.7 v1(74.5,21.7) ; v1(85.5,35) 85.567,35 85.867,35.3 86.8,35.3 87.5,36 87.5,37.683 87.917,38.1 90.131,38.1 U3.5@90.576,37.655 ; U3.5 93.075,37.675 R14.2
  BOT w0.2: v1(74.5,21.7) 74.5,21.633 74.8,21.333 74.8,20.1 75.5,19.4 82.2,19.4 82.8,20 82.8,33.034 84.766,35 v1(85.5,35)
"I2C2_SCL (DISP)": P8.4 R8.2 U1.47 | length 16.3
  TOP w0.2: P8.4 71.8,43.5 71.3,43 R8.2 71.483,42.117 71.983,42.117 73,41.1 73,36.2 74.75,34.45 U1.47
"I2C2_SDA (DISP)": P8.3 R9.2 U1.48 | length 17.4
  TOP w0.2: P8.3 69.26,43.54 69.7,43.1 R9.2 70.5,41.5 72.034,41.5 72.6,40.934 72.6,35.966 74.25,34.316 U1.48
MCU_BOOT: C13.1 R17.2 U1.60 | length 13.1
  TOP w0.2: C13.1 R17.2 67.8,21.9 68.45,22.55 U1.60
MCU_RESET#: C14.1 P1.2 R18.2 U1.7 | length 52.9
  TOP w0.2: P1.2 60.087,43 64.4,43 73.3,34.1 73.3,28.7 73.6,28.4 76,28.4 77.25,27.15 U1.7 77.25,15.865 78.165,14.95 80.084,14.95 80.5,14.534 v1(80.5,13.1) ; v1(83,13.1) 84.7,13.1 C14.1 R18.2
  BOT w0.2: v1(80.5,13.1) v1(83,13.1)
MCU_SWCLK: P1.4 U1.49 | length 29.9
  TOP w0.2: P1.4 55.407,42.6 64.234,42.6 72.9,33.934 U1.49@72.9,28.1
MCU_SWDIO: P1.3 U1.46 | length 33.1
  TOP w0.2: P1.3 57.447,46.3 62.1,46.3 62.58,45.82 62.58,43.82 63,43.4 64.6,43.4 73.7,34.3 73.7,28.917 73.817,28.8 75.133,28.8 75.25,28.917 U1.46
MPU6050_SCL: P15.3 U8.17 | length 26.6
  BOT w0.2: P15.3@46.5,41 48.5,39 54,39 54.7,38.3 54.7,28.766 54.534,28.6 51.8,28.6 51.3,28.1 51.3,26 52.025,25.275 U8.17
MPU6050_SDA: P15.4 U8.18 | length 23.8
  BOT w0.2: P15.4@49.04,41 49.04,40.96 50.6,39.4 54.2,39.4 55.1,38.5 55.1,28.6 54.7,28.2 52,28.2 51.7,27.9 51.7,26.2 51.975,25.925 U8.18
NetBOOT1_2: BOOT1.2 R17.1 R19.1 | length 5
  TOP w0.2: R17.1 R19.1 66.2,11.8 66.7,11.3 BOOT1.2
NetR1_3: R1.3 VT1.3 | length 9.1
  TOP w0.2: R1.3@64,3.1 65,2.1 71.3,2.1 72.2,3 VT1.3
NetR2_1: R2.1 VT1.1 | length 1.8
  TOP w0.2: VT1.1 73.2,5.7 R2.1
NetR4_1: R4.1 VT2.1 | length 1.7
  TOP w0.2: VT2.1@84,9 R4.1@84,10.7
NetR5_3: R5.3 VT3.3 | length 16.9
  TOP w0.2: R5.3@60.2,3.1 61.6,1.7 74.5,1.7 75.8,3 VT3.3
NetR7_1: R7.1 VT3.1 | length 1.8
  TOP w0.2: VT3.1 76.8,5.7 R7.1
NetR11_3: R11.3 VT4.3 | length 24.5
  TOP w0.2: R11.3@56.5,3.1 58.3,1.3 77.7,1.3 79.1,2.7 79.4,3 VT4.3
NetR12_1: R12.1 VT4.1 | length 1.8
  TOP w0.2: VT4.1 80.4,5.7 R12.1
NetR16_2: R16.2 R18.1 RESET1.1 | length 4.8
  TOP w0.2: R16.2 R18.1 87.9,11.3 RESET1.1
NetR22_2: R22.2 VD1.C | length 1.6
  TOP w0.2: R22.2 VD1.C
NetR23_2: R23.2 VD2.C | length 1.6
  TOP w0.2: R23.2 VD2.C
NetR24_2: R24.2 VD3.C | length 1.6
  TOP w0.2: R24.2 VD3.C
NetR26_1: R26.1 U8.1 | length 1.5
  BOT w0.2: U8.1 59,28.4 R26.1
NetTP1_1: TP1.1 U1.37 | length 6.2
  TOP w0.2: U1.37 79.75,34.55 TP1.1
NetTP2_1: TP2.1 U1.41 | length 5.9
  TOP w0.2: U1.41 77.75,35.15 TP2.1
NetTP3_1: TP3.1 U1.45 | length 5.9
  TOP w0.2: TP3.1 75.75,35.15 U1.45
NetU2_1: U2.1 VT2.3 | length 3.1
  TOP w0.2: U2.1@82.8,3.8 U2.1@83.04,3.56 ; VT2.3 83,5.4 83.4,5 U2.1
OSC_HSE_A: C8.1 U1.6 ZQ1.2 | length 7
  TOP w0.2: U1.6 76.75,15.45 ZQ1.2@78.4,13.8 ; C8.1 ZQ1.2@79,13
OSC_HSE_B: C15.1 U1.5 ZQ1.1 | length 7
  TOP w0.2: C15.1 ZQ1.1@74,13 ; ZQ1.1@74.6,13.8 76.25,15.45 U1.5
PVDD_3V3: C17.1 P11.1 U4.3 VD1.A X2.1 | length 31.4
  TOP w0.2: VD1.A U4.3@15.9,33.3
  TOP w0.8: U4.3@18.9,34.6 C17.1 29.4,34.6 35.2,40.4 37.3,40.4 41.6,44.7 P11.1
  other v1: 12.3,33.7 13.3,33.7 14.3,33.7 15.3,33.7 16.3,33.7 17.3,33.7 18.3,33.7 12.3,34.7 13.3,34.7 14.3,34.7 15.3,34.7 16.3,34.7 17.3,34.7 18.3,34.7 12.3,35.7 13.3,35.7 14.3,35.7 15.3,35.7 16.3,35.7 17.3,35.7 18.3,35.7 12.3,36.7 13.3,36.7 14.3,36.7 15.3,36.7 16.3,36.7 17.3,36.7 18.3,36.7 12.3,37.7 13.3,37.7 14.3,37.7 15.3,37.7 16.3,37.7 17.3,37.7 18.3,37.7
SERVO_1: P2.1 U1.36 | length 20.1
  TOP w0.3: U1.36 80.25,32.157 82.293,34.2 91.693,34.2 93.253,35.76 P2.1
SERVO_2: P2.2 U1.35 | length 19.8
  TOP w0.3: U1.35 80.75,31.95 82.5,33.7 91.9,33.7 92.6,34.4 v1(93.5,34.4)
  BOT w0.3: v1(93.5,34.4) 93.5,35 94.26,35.76 P2.2
SERVO_3: P2.3 U1.34 | length 17.8
  TOP w0.3: U1.34 81.25,31.743 82.707,33.2 96.98,33.2 P2.3
SERVO_4: P2.4 U1.30 | length 16
  TOP w0.2: U1.30 U1.30@84.05,27.1
  TOP w0.3: U1.30 87.014,27.05 91.864,31.9 v1(93.5,31.9)
  BOT w0.3: v1(93.5,31.9) 93.5,32.46 94.26,33.22 P2.4
SERVO_5: P2.5 U1.29 | length 14.7
  TOP w0.3: U1.29 87.222,26.55 91.352,30.68 P2.5
SERVO_6: P2.6 U1.28 | length 15.2
  TOP w0.3: U1.28 87.429,26.05 90.779,29.4 v1(93.5,29.4)
  BOT w0.3: v1(93.5,29.4) 93.5,29.92 94.26,30.68 P2.6
SERVO_7: P2.7 U1.27 | length 14.1
  TOP w0.3: U1.27 87.636,25.55 90.226,28.14 P2.7
SERVO_8: P2.8 U1.26 | length 14.6
  TOP w0.3: U1.26 87.843,25.05 89.693,26.9 v1(93.5,26.9)
  BOT w0.3: v1(93.5,26.9) 93.5,27.38 94.26,28.14 P2.8
SERVO_9: P2.9 U1.25 | length 13.4
  TOP w0.3: U1.25 88.05,24.55 89.1,25.6 P2.9
SERVO_10: P2.19 U1.14 | length 19.4
  TOP w0.3: U1.14 80.75,16.669 83.019,14.4 91.793,14.4 93.293,12.9 P2.19
SERVO_11: P2.20 U1.15 | length 19.2
  TOP w0.3: U1.15 81.25,16.914 83.264,14.9 92,14.9 92.6,14.3 v1(93.5,14.3)
  BOT w0.3: v1(93.5,14.3) 93.5,13.66 94.26,12.9 P2.20
SERVO_12: P2.17 U1.16 | length 17.1
  TOP w0.3: U1.16 81.75,17.15 83.5,15.4 P2.17@97,15.4
SERVO_13: P2.18 U1.18 | length 16.1
  TOP w0.3: U1.18 85.145,21.05 85.645,21.55 86.95,21.55 91.6,16.9 v1(93.5,16.9)
  BOT w0.3: v1(93.5,16.9) 93.5,16.2 94.26,15.44 P2.18
SERVO_14: P2.15 U1.20 | length 14.7
  TOP w0.3: U1.20 85.145,22.05 87.222,22.05 91.292,17.98 P2.15
SERVO_15: P2.16 U1.21 | length 15.3
  TOP w0.3: U1.21 87.429,22.55 90.579,19.4 v1(93.5,19.4)
  BOT w0.3: v1(93.5,19.4) 93.5,18.74 94.26,17.98 P2.16
SERVO_16: P2.13 U1.22 | length 14
  TOP w0.3: U1.22 87.636,23.05 90.166,20.52 P2.13
SERVO_17: P2.14 U1.23 | length 14.6
  TOP w0.3: U1.23 87.843,23.55 89.493,21.9 v1(93.5,21.9)
  BOT w0.3: v1(93.5,21.9) 93.5,21.28 94.26,20.52 P2.14
SERVO_18: P2.11 U1.24 | length 13.4
  TOP w0.3: U1.24 88.05,24.05 89.04,23.06 P2.11
SERVO_PWR_EN: P3.3 U1.10 | length 84.8
  TOP w0.2: P3.3@4.2,26.84 6.74,24.3 14.1,24.3 14.7,23.7 14.7,21.1 15.2,20.6 18.1,20.6 19.3,19.4 21.766,19.4 25.566,15.6 34.6,15.6 36.3,13.9 55.3,13.9 v1(55.8,14.4) ; v1(78.5,16.5) 78.5,16.9 78.75,17.15 U1.10
  BOT w0.2: v1@55.658,14.542 56.3,13.9 70.934,13.9 73.234,16.2 78.133,16.2 78.433,16.5 v1(78.5,16.5)
SMCU_RESET#: P4.2 R25.2 U8.4 | length 23.1
  BOT w0.2: P4.2 56.3,38.76 56.3,28 55.7,27.4 55.7,25.3 55.95,25.05 56.75,25.05 56.975,25.275 U8.4 59.075,25.35 59.75,25.35 60,25.6 60,26.2 R25.2
SMCU_SWCLK: P4.4 U8.19 | length 19
  BOT w0.2: U8.19 52.217,26.575 52.1,26.692 52.1,27.683 52.217,27.8 54.9,27.8 55.5,28.4 55.5,38.745 53.36,40.885 P4.4
SMCU_SWDIO: P4.3 U8.20 | length 16
  BOT w0.2: U8.20 54.925,27.225 55.9,28.2 P4.3
SMCU_TX: U1.52 U8.8 | length 14.8
  TOP w0.2: v1(66.85,26.55) U1.52
  BOT w0.2: U8.8 59.725,22.675 60,22.4 62.7,22.4 v1(66.85,26.55)
VDD_11V1: C16.1 C18.1 C20.1 P3.1 R20.2 U4.2 U5.2 U6.2 | length 38.2
  TOP w0.2: R20.2 11.1,21.66 U5.2@11.2,21.76
  TOP w1: C16.1@4,32.3 5.3,32.3 6.2,33.2 U4.2@7.8,33.2 ; C20.1@4.1,10.7 U6.2@7.7,10.7 ; P3.1@4.1,21.76 U5.2@11.2,21.76
  BOT w0.5: v1@3.15,32.05 2.6,31.5 2.6,11.846 v1@3.235,11.211
  other v1: 3.3,10.2 4.3,10.2 3.3,11.2 4.3,11.2 2.6,21.3 2.6,22.2 3.3,31.9 4.3,31.9 3.3,32.9 4.3,32.9
VIN_ADC: R20.1 R21.2 U1.11 | length 73
  TOP w0.2: R20.1 R21.2 15.1,19 21.6,19 25.4,15.2 34.4,15.2 36.1,13.5 55.3,13.5 v1(55.8,13) ; U1.11 79.25,17.15 79.5,16.9 v1(79.5,16.5)
  BOT w0.2: v1(55.8,13) 56.3,13.5 71.1,13.5 73.4,15.8 78.8,15.8 v1(79.5,16.5)
pads on no net: R1.1 R5.1 R11.1 U1.9 U1.38 U1.39 U1.40 U1.50 U1.51 U1.53 U1.54 U1.57 U1.58 U1.59 U7.4 U7.6 U7.8 U7.9 U7.12 U7.13 U7.14 U7.15 U7.16 U7.17 U7.23 U7.25 U7.27 U7.28 U8.7 U8.9 U8.10 U9.14 U9.15

## Polygon pours and split planes (outlines as drawn)
DGND on TOP "TOP_DGND" (solid, remove dead copper, pour order 33): 0,0 100,0 100,48.5 0,48.5
DGND on BOT "BOT_DGND" (solid, remove dead copper, pour order 31): 0,0 100,0 100,48.5 0,48.5

## Other copper
BOT:
  region net DVDD_5V0: 7,20.5 16.7,20.5 16.7,19 18.3,19 18.3,20.5 27,20.5 27,7.5 7,7.5
  region net PVDD_3V3: 7,41 27,41 27,28 7,28
  region net VDD_11V1: 5.3,11.9 5.3,9.5 2.3,9.5 2.3,11.9
  region net VDD_11V1: 5.3,33.6 5.3,31.2 2.3,31.2 2.3,33.6

## Silkscreen, mask and mechanical layers (free items; w line width, h text height)
Top Overlay:
  circle w0.254: c50.1,23.5 r0.1
  circle w0.254: c73.8,45.9 r0.1
  circle w0.254: c62.2,42.1 r0.1
  circle w0.254: c62.1,45.9 r0.1
  circle w0.254: c40.3,42.2 r0.1
  circle w0.254: c82.1,2.6 r0.1
  circle w0.254: c94.3,37.5 r0.1
  circle w0.254: c83.3,42.5 r0.1
  circle w0.254: c5.8,20 r0.1
  circle w0.254: c42.8,2.6 r0.1
  circle w0.254: c7,2.6 r0.1
  circle w0.254: c7,45.9 r0.1
  circle w0.254: c63,45.9 r0.1
  circle w0.254: c28.6,2.6 r0.1
  circle w0.254: c17.8,2.6 r0.1
  circle w0.254: c28.6,45.9 r0.1
  circle w0.254: c17.8,45.9 r0.1
  circle w0.254: c42.8,45.9 r0.1
  text "FOOT SENSORS" at 16.2,46.7 h1.2
  text "ESP32" at 42.4,46.7 h1.2
  text "SWD" at 55.2,46.7 h1.2
  text "DISPLAY" at 64,46.7 h1.2
  text "FTDI" at 76.8,46.7 h1.2
  text "MPU6050" at 31.5,39.4 h1.2
  text "SERVO CONNECTOR" at 92.7,15.4 h1.2 r90
  text "RESET" at 93.9,4.4 h1.2 r90
  text "FOOT SENSORS" at 15.7,0.6 h1.2
  text "LEDS" at 45.9,0.6 h1.2
  text "BOOT" at 65.7,0.6 h1.2
  text "BUZZER" at 81.5,0.6 h1.2
Bottom Overlay:
  circle w0.254: c60.4,28.2 r0.1
  circle w0.254: c42.5,20.5 r0.1
Top Solder:
  text "v1.01-1" at 43.8,6.7 h1.5
M4-BOARD:
  lines w0.2: 0,0 40,0 100,0 100,48.5 40,48.5 0,48.5 0,31.5 0,16.9 0,0